# EAGLE board SAME54-board-1.0.2 (EAGLE 9.6.2)

Size 86.22 x 72.59 mm. Coordinates in mm from the lower left corner, seen from the top.
Copper layers (1*16): Top 0.035mm / dielectric 1.5mm / Bottom 0.035mm
Design rules "default": minimum track width 6mil, minimum drill 0.35mm, track to track 6mil, track to pad 6mil, pad to pad 6mil, via to via 6mil, smd to smd 6mil, copper to edge 40mil, drill to drill 6mil, minimum pad ring 10mil, minimum via ring 8mil, stop-mask expansion 4mil, vias tented up to drill 0mil, thermal gap 10mil

## Footprints (pad centres in the part's own frame; a part is rotated, then mirrored left to right if it is on the bottom)
LL3301BF065QJ = smd 2.1 x 1.4: 1 -3,2.25; 2 3,2.25; 3 -3,-2.25; 4 3,-2.25
C1206 = smd 1.6 x 1.8: 1 -1.4,0; 2 1.4,0
BLA31AG102SN4D = smd 0.8 x 0.4: 1 -0.8,1.2; 2 -0.8,0.4; 3 -0.8,-0.4; 4 -0.8,-1.2; 5 0.8,-1.2; 6 0.8,-0.4; 7 0.8,0.4; 8 0.8,1.2
QFP50P1600X1600X120-100N = smd 1.475 x 0.3: 1 -7.738,6; 2 -7.738,5.5; 3 -7.738,5; 4 -7.738,4.5; 5 -7.738,4; 6 -7.738,3.5; 7 -7.738,3; 8 -7.738,2.5; 9 -7.738,2; 10 -7.738,1.5; 11 -7.738,1; 12 -7.738,0.5; 13 -7.738,0; 14 -7.738,-0.5; 15 -7.738,-1; 16 -7.738,-1.5; 17 -7.738,-2; 18 -7.738,-2.5; 19 -7.738,-3; 20 -7.738,-3.5; 21 -7.738,-4; 22 -7.738,-4.5; 23 -7.738,-5; 24 -7.738,-5.5; 25 -7.738,-6; 51 7.738,-6; 52 7.738,-5.5; 53 7.738,-5; 54 7.738,-4.5; 55 7.738,-4; 56 7.738,-3.5; 57 7.738,-3; 58 7.738,-2.5; 59 7.738,-2; 60 7.738,-1.5; 61 7.738,-1; 62 7.738,-0.5; 63 7.738,0; 64 7.738,0.5; 65 7.738,1; 66 7.738,1.5; 67 7.738,2; 68 7.738,2.5; 69 7.738,3; 70 7.738,3.5; 71 7.738,4; 72 7.738,4.5; 73 7.738,5; 74 7.738,5.5; 75 7.738,6 | smd 0.3 x 1.475: 26 -6,-7.738; 27 -5.5,-7.738; 28 -5,-7.738; 29 -4.5,-7.738; 30 -4,-7.738; 31 -3.5,-7.738; 32 -3,-7.738; 33 -2.5,-7.738; 34 -2,-7.738; 35 -1.5,-7.738; 36 -1,-7.738; 37 -0.5,-7.738; 38 0,-7.738; 39 0.5,-7.738; 40 1,-7.738; 41 1.5,-7.738; 42 2,-7.738; 43 2.5,-7.738; 44 3,-7.738; 45 3.5,-7.738; 46 4,-7.738; 47 4.5,-7.738; 48 5,-7.738; 49 5.5,-7.738; 50 6,-7.738; 76 6,7.738; 77 5.5,7.738; 78 5,7.738; 79 4.5,7.738; 80 4,7.738; 81 3.5,7.738; 82 3,7.738; 83 2.5,7.738; 84 2,7.738; 85 1.5,7.738; 86 1,7.738; 87 0.5,7.738; 88 0,7.738; 89 -0.5,7.738; 90 -1,7.738; 91 -1.5,7.738; 92 -2,7.738; 93 -2.5,7.738; 94 -3,7.738; 95 -3.5,7.738; 96 -4,7.738; 97 -4.5,7.738; 98 -5,7.738; 99 -5.5,7.738; 100 -6,7.738
SHDR2W110P0X500_1X2_1000X950X1 = drill 1.3 pad 1.95 square: 1 0,0 | drill 1.3 pad 1.95: 2 5,0
1X09 = drill 1.016 long: 1 -10.16,0; 2 -7.62,0; 3 -5.08,0; 4 -2.54,0; 5 0,0; 6 2.54,0; 7 5.08,0; 8 7.62,0; 9 10.16,0
LQH31CN100K03L = smd 1.75 x 1.5: 1 -1.375,0; 2 1.375,0
M1206 = smd 1.6 x 2: 1 -1.4,0; 2 1.4,0
GSD09002SEU = smd 1.5 x 1: 1 -14.183,6.3; 2 -14.183,3.8; 3 -14.183,0.45; 4 -14.183,-1.2; 5 -14.183,-3.7; 6 -14.183,-6.2; 7 -14.183,-8.63; 8 -14.183,-10.33; 9 -14.183,8.8; CD1 -14.183,2.1 | smd 2 x 1.2: G1 6.827,13.8; G2 8.027,-14.2 | smd 1.5 x 1.45: WP1 -14.183,-13.68 | hole 1.7: 10.127,11.5; 10.127,-12.65
21-100130_MXM = smd 0.914 x 0.254: 1 -2.349,1.5; 2 -2.349,1; 3 -2.349,0.5; 4 -2.349,0; 5 -2.349,-0.5; 6 -2.349,-1; 7 -2.349,-1.5; 15 2.349,-1.5; 16 2.349,-1; 17 2.349,-0.5; 18 2.349,0; 19 2.349,0.5; 20 2.349,1; 21 2.349,1.5 | smd 0.254 x 0.914: 8 -1.5,-2.349; 9 -1,-2.349; 10 -0.5,-2.349; 11 0,-2.349; 12 0.5,-2.349; 13 1,-2.349; 14 1.5,-2.349; 22 1.5,2.349; 23 1,2.349; 24 0.5,2.349; 25 0,2.349; 26 -0.5,2.349; 27 -1,2.349; 28 -1.5,2.349 | smd 2.794 x 2.794: 29 0,0

## Placement (x,y rotation side)
BTN  LL3301BF065QJ  [LL3301BF065QJ]  -34.08,34.3 0 top  (outside the outline)
C1  100n  [C1206]  -55.67,34.3 0 top  (outside the outline)
C2  10uF/10V  [C1206]  -49.32,34.3 0 top  (outside the outline)
C3  100n  [C1206]  -62.02,34.3 0 top  (outside the outline)
C4  10u  [C1206]  -67.1,45.73 0 top  (outside the outline)
C5  10u  [C1206]  -72.18,45.73 0 top  (outside the outline)
C6  10u  [C1206]  -16.3,52.08 0 top  (outside the outline)
C7  100n  [C1206]  -68.37,34.3 0 top  (outside the outline)
C8  100n  [C1206]  -17.57,45.73 0 top  (outside the outline)
C9  100n  [C1206]  -23.92,45.73 0 top  (outside the outline)
C10  4.7u  [C1206]  -62.02,45.73 0 top  (outside the outline)
C11  100n  [C1206]  -30.27,45.73 0 top  (outside the outline)
FERRITE_BEAD_1  BLA31AG221SN4D  [BLA31AG102SN4D]  -46.78,76.21 0 top  (outside the outline)
IC1  ATSAME54N20A-AUT  [QFP50P1600X1600X120-100N]  -56.94,7.63 0 top  (outside the outline)
J2  1985920  [SHDR2W110P0X500_1X2_1000X950X1]  -22.65,36.84 0 top  (outside the outline)
JP4  [1X09]  -26.46,76.21 0 top  (outside the outline)
L1  LQH31MN100J03L  [LQH31CN100K03L]  -64.56,76.21 0 top  (outside the outline)
R1  100k  [M1206]  -36.62,45.73 0 top  (outside the outline)
R2  10k  [M1206]  -21.38,52.08 0 top  (outside the outline)
R3  100k  [M1206]  -42.97,45.73 0 top  (outside the outline)
R4  100k  [M1206]  -49.32,45.73 0 top  (outside the outline)
R5  100k  [M1206]  -55.67,45.73 0 top  (outside the outline)
R6  10k  [M1206]  -26.46,52.08 0 top  (outside the outline)
R7  10k  [M1206]  -31.54,52.08 0 top  (outside the outline)
R8  10k  [M1206]  -36.62,52.08 0 top  (outside the outline)
R9  330  [M1206]  -41.7,52.08 0 top  (outside the outline)
R10  1k  [M1206]  -46.78,52.08 0 top  (outside the outline)
SD_CONN  GSD09002SEU  [GSD09002SEU]  -30.27,15.25 0 top  (outside the outline)
U1  MAX20034ATIS/VY+  [21-100130_MXM]  -70.16,-4.94 0 top  (outside the outline)

## Library data of the parts
BTN = SamacSys_Parts; DESCRIPTION: Pushbutton Switches 50mA 12VDC F065 9.5mm J-Lead; HEIGHT: 9.8mm; MANUFACTURER_NAME: E-Switch; MANUFACTURER_PART_NUMBER: LL3301BF065QJ; MOUSER_PART_NUMBER: 612-LL3301BF065QJ; MOUSER_PRICE-STOCK: https://www.mouser.co.uk/ProductDetail/E-Switch/LL3301BF065QJ?qs=QtyuwXswaQgf5j8qoJZz7w%3D%3D
C1-C11 = rcl; SPICEPREFIX: C
FERRITE_BEAD_1 = SamacSys_Parts; DESCRIPTION: Murata Power Solutions Ferrite Bead, 3.2 x 1.6 x 0.8mm (3216), 220 impedance at 100 MHz; HEIGHT: 1mm; MANUFACTURER_NAME: Murata Electronics; MANUFACTURER_PART_NUMBER: BLA31AG221SN4D; MOUSER_PART_NUMBER: 81-BLA31AG221SN4D; MOUSER_PRICE-STOCK: https://www.mouser.com/Search/Refine.aspx?Keyword=81-BLA31AG221SN4D
IC1 = SamacSys_Parts; DESCRIPTION: ARM Microcontrollers - MCU 120MHZ 1024KB FLASH 100 TQFP PKG IN 85C; HEIGHT: 1.2mm; MANUFACTURER_NAME: Microchip; MANUFACTURER_PART_NUMBER: ATSAME54N20A-AUT; MOUSER_PART_NUMBER: 556-ATSAME54N20AAUT; MOUSER_PRICE-STOCK: https://www.mouser.co.uk/ProductDetail/Microchip-Technology/ATSAME54N20A-AUT?qs=HXFqYaX1Q2wziE5NRG3J9w%3D%3D
J2 = SamacSys_Parts; DESCRIPTION: Fixed Terminal Blocks MKDSN 2.5/ 2 HT BK; HEIGHT: 15.15mm; MANUFACTURER_NAME: Phoenix Contact; MANUFACTURER_PART_NUMBER: 1985920; MOUSER_PART_NUMBER: 651-1985920; MOUSER_PRICE-STOCK: https://www.mouser.com/Search/Refine.aspx?Keyword=651-1985920
JP4 = pinhead
L1 = SamacSys_Parts; DESCRIPTION: Murata LQH31MN Series Wire-wound SMD Inductor 10 uH +/-5% 100mA Idc Q:35; HEIGHT: 2mm; MANUFACTURER_NAME: Murata Electronics; MANUFACTURER_PART_NUMBER: LQH31MN100J03L; MOUSER_PART_NUMBER: 81-LQH31MN100J03L; MOUSER_PRICE-STOCK: https://www.mouser.co.uk/ProductDetail/Murata-Electronics/LQH31MN100J03L?qs=nr3D09lmWEs2Q3QeLFujyQ%3D%3D
R1-R10 = rcl; SPICEPREFIX: R
SD_CONN = SamacSys_Parts; DESCRIPTION: Memory Card Connectors SD, 9 pos, 15U; HEIGHT: 2.75mm; MANUFACTURER_NAME: Amphenol; MANUFACTURER_PART_NUMBER: GSD09002SEU; MOUSER_PART_NUMBER: 523-GSD09002SEU; MOUSER_PRICE-STOCK: https://www.mouser.co.uk/ProductDetail/Amphenol-Commercial-Products/GSD09002SEU?qs=J%2Fw1naXNy4LtG6w9y13mdQ%3D%3D
U1 = LAMS_lib; MANUFACTURER_PART_NUMBER: MAX20034ATISVY+; VENDOR: Maxim Integrated Products

## Nets
AGND: U1.9
EPAD: U1.29
GND: BTN.1 BTN.2 C1.2 C2.2 C3.2 C4.2 C5.2 C6.2 C7.2 C8.2 C9.2 C10.2 C11.2 IC1.11 IC1.24 IC1.31 IC1.38 IC1.50 IC1.62 IC1.76 IC1.90 J2.2 SD_CONN.3 SD_CONN.6 SD_CONN.G1 SD_CONN.G2
N$2: R2.1 SD_CONN.2
N$4: BTN.3 BTN.4 R9.2
PGND1: U1.3
PGND2: U1.20
RESETN: C3.1 IC1.88 JP4.1 R8.1 R9.1
SDCD: IC1.34 R6.1 SD_CONN.CD1
SDCK: IC1.33 SD_CONN.5
SDCMD: IC1.26
SDDAT[0]: IC1.27 R3.1 SD_CONN.7
SDDAT[1]: IC1.28 R4.1 SD_CONN.8
SDDAT[2]: IC1.29 R5.1 SD_CONN.9
SDDAT[3]: IC1.32 R1.1 SD_CONN.1
SDWP: IC1.35 R7.1 SD_CONN.WP1
SWDCLK: IC1.93 JP4.3 R10.1
SWDIO: IC1.94 JP4.4
SWO: IC1.95 JP4.2
TRACECLK: IC1.85 JP4.9
TRACEDATA[0]: IC1.86 JP4.5
TRACEDATA[1]: IC1.84 JP4.6
TRACEDATA[2]: IC1.83 JP4.7
TRACEDATA[3]: IC1.82 JP4.8
VCC: C1.1 C2.1 J2.1 R1.2 R2.2 R3.2 R4.2 R5.2 R6.2 R7.2 R8.2 R10.2 SD_CONN.4
VDDANA: C6.1 C8.1 FERRITE_BEAD_1.5 FERRITE_BEAD_1.6 FERRITE_BEAD_1.7 FERRITE_BEAD_1.8 IC1.12
VDDCORE: C10.1 C11.1 IC1.89 L1.1
VDDIO: C5.1 C9.1 FERRITE_BEAD_1.1 FERRITE_BEAD_1.2 FERRITE_BEAD_1.3 FERRITE_BEAD_1.4 IC1.39 IC1.51 IC1.63 IC1.77 IC1.92
VDDIOB: C4.1 C7.1 IC1.25 IC1.30
VSW: IC1.91 L1.2

## Tracks (layer width: path | path; a pad name or v marks a point on that pad's centre or on a via)
GND  (25 unrouted)
N$2  (1 unrouted)
N$4  (2 unrouted)
RESETN  (4 unrouted)
SDCD  (2 unrouted)
SDCK  (1 unrouted)
SDDAT[0]  (2 unrouted)
SDDAT[1]  (2 unrouted)
SDDAT[2]  (2 unrouted)
SDDAT[3]  (2 unrouted)
SDWP  (2 unrouted)
SWDCLK  (2 unrouted)
SWDIO  (1 unrouted)
SWO  (1 unrouted)
TRACECLK  (1 unrouted)
TRACEDATA[0]  (1 unrouted)
TRACEDATA[1]  (1 unrouted)
TRACEDATA[2]  (1 unrouted)
TRACEDATA[3]  (1 unrouted)
VCC  (12 unrouted)
VDDANA  (6 unrouted)
VDDCORE  (3 unrouted)
VDDIO  (10 unrouted)
VDDIOB  (3 unrouted)
VSW  (1 unrouted)

## Text on the board
Dimension: C:/Users/Kris/Desktop/LAMS/lams-logo_PCB-OUTLINE.bmp